# Altium PCB STM32四轴.PcbDoc (part 2 of 2)
Units mil, origin at the board's own origin, x right, y up, seen from the top; angles counter-clockwise.
Board outline 3937.01 x 3937.01 mil, 2 copper layers (Top Layer, Bottom Layer); 118 components, 144 nets, 597 pads, 182 vias.
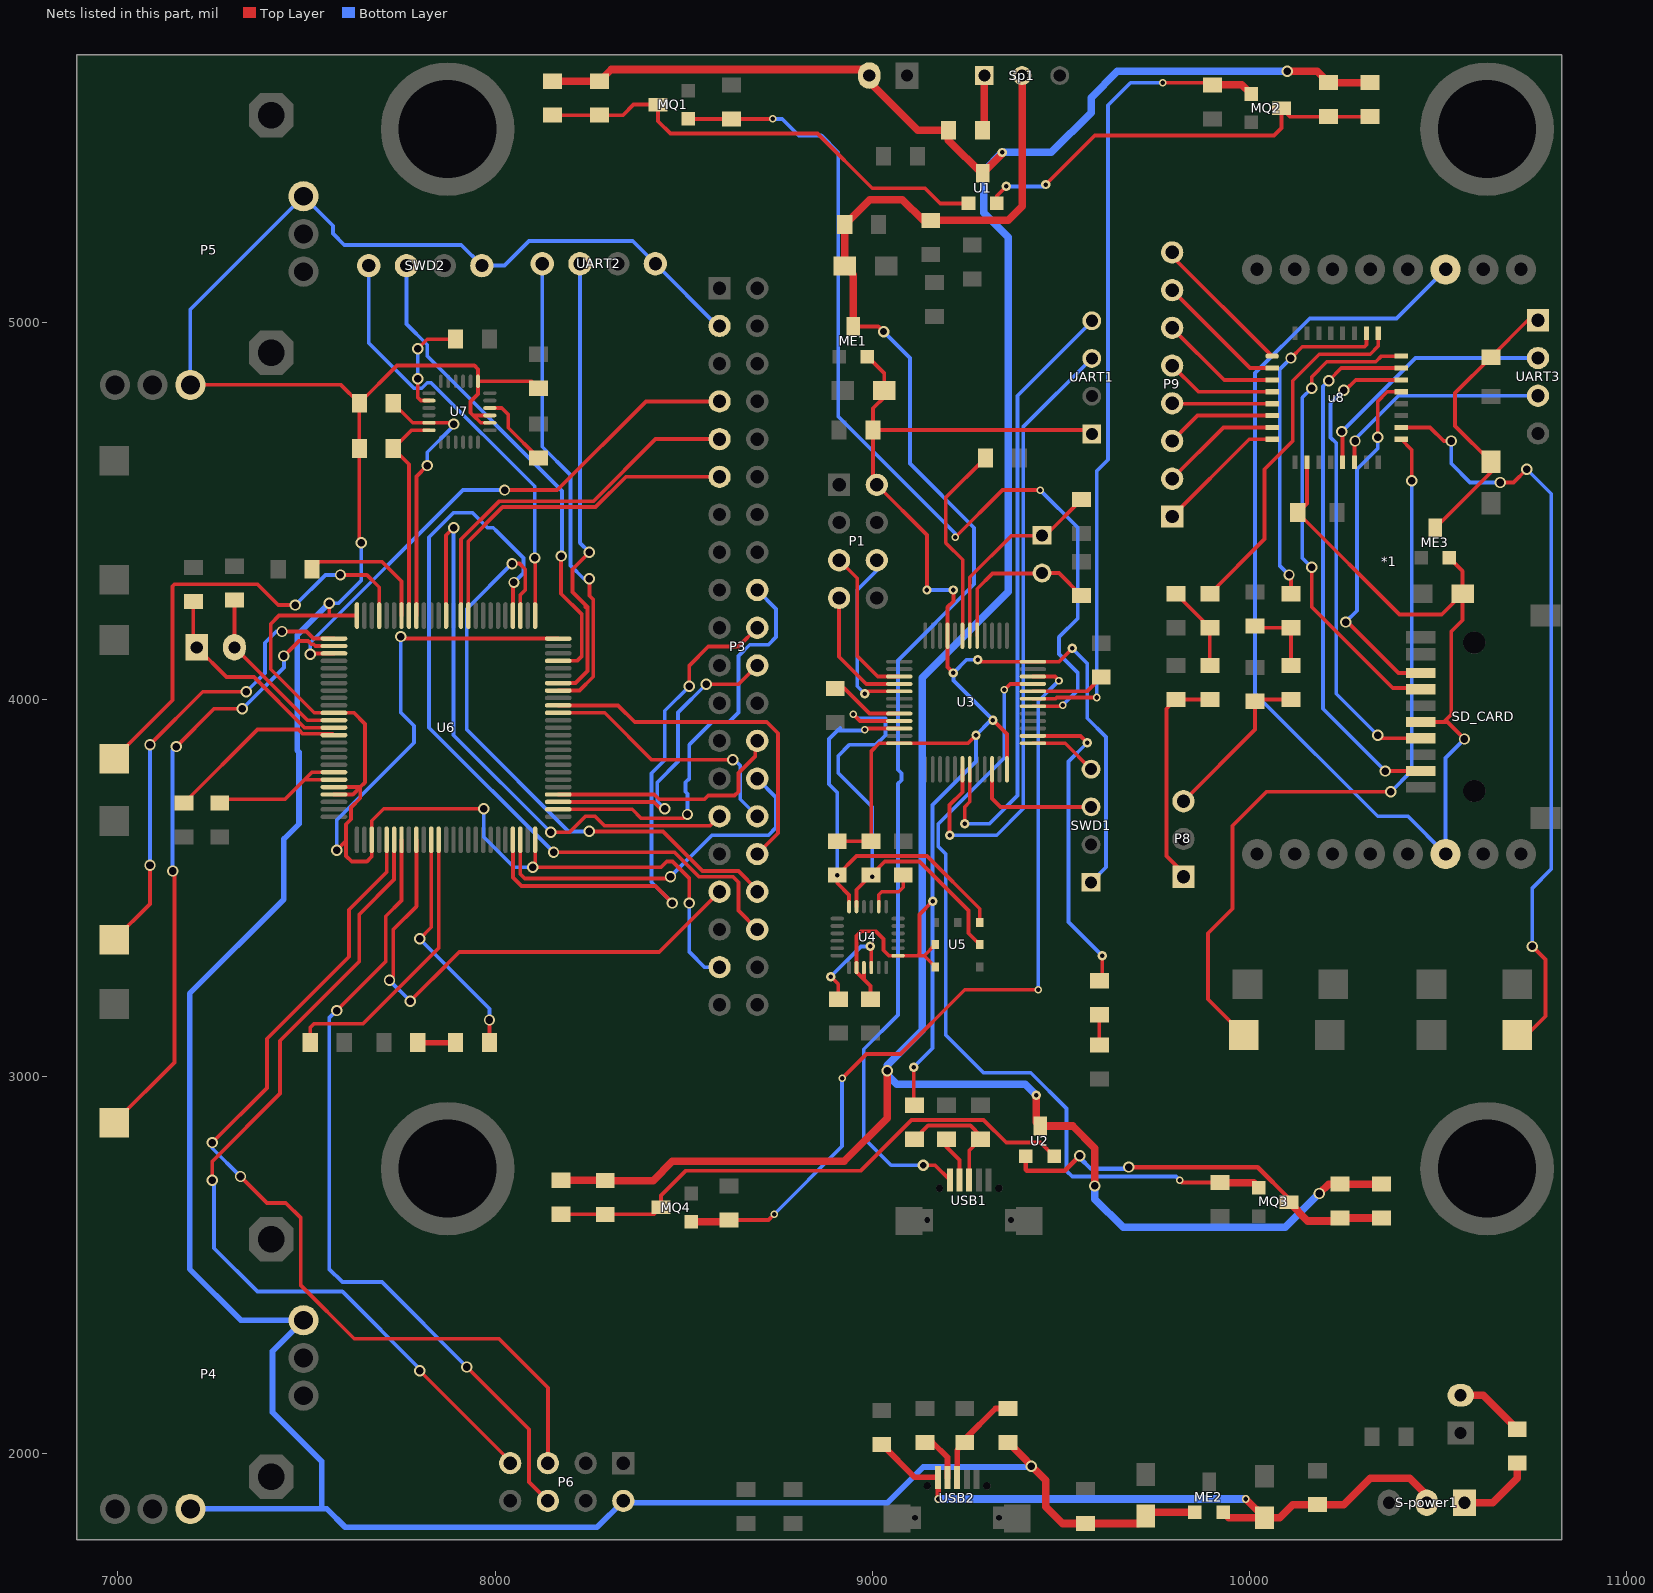
[diagram p2: the nets of this part, all layers, seen from the top]

## Via types
v1: diameter 30, hole 20, Top Layer to Bottom Layer, 121 vias
v2: diameter 25, hole 12, Top Layer to Bottom Layer, 40 vias
v3: diameter 20, hole 12, Top Layer to Bottom Layer, 18 vias
v4: diameter 30, hole 18, Top Layer to Bottom Layer, 3 vias

## Nets (pads, with @x,y where several pads share a name; then routed paths per layer and width w, separated by ;. In a path a pad name is that pad's centre, name@x,y a point inside that pad or via, vN(x,y) a via of type N, cw(c..) or ccw(c..) an arc to the next point about the centre after c; other vN are vias at no path point) (continued)
KEY2Y: S2.1 U6.97 | length 1216
  Top Layer w10: S2.1@6990,3842.52 7145,3997.52 7145,4300 7150,4305 7370,4305 7425,4250 v1(7470,4250) ; v1(7590,4330) 7660,4330 7692.83,4297.17 U6.97@7692.83,4222.24
  Bottom Layer w10: v1(7470,4250) 7550,4330 v1(7590,4330)
KEY3-51: S7.1 u8.18 | length 2050.5
  Top Layer w10: u8.18@10402.52,4721.02 10478.98,4721.02 10515,4685 v1(10535,4685) ; v1(10665,4575) 10700,4575 v1(10735,4610) ; S7.1@10710,3110 10735,3110 10785,3160 10785,3310 v1(10750,3345)
  Bottom Layer w10: v1(10535,4685) 10535,4625 10585,4575 v1(10665,4575) ; v1(10735,4610) 10800,4545 10800,3550 10750,3500 v1(10750,3345)
KEY3Y: S3.1 U6.1 | length 1223.5
  Top Layer w10: S3.1@6990,3362.52 7085,3457.52 v1(7085,3560) ; v1(7085,3880) 7225,4020 v1(7340,4020) ; v1(7435,4180) 7500,4180 7518.78,4161.22 U6.1@7572.76,4161.22
  Bottom Layer w10: v1(7085,3560) v1(7085,3880) ; v1(7340,4020) 7390,4070 7390,4150 7420,4180 v1(7435,4180)
KEY4-51: S8.1 u8.17 | length 2047.2
  Top Layer w10: S8.1@9985,3110 9890,3205 9890,3380 9955,3445 9955,3665 10045,3755 v1(10375,3755) ; u8.17@10402.52,4689.53 10430,4662.05 v1(10430,4580)
  Bottom Layer w10: v1(10375,3755) 10430,3810 v1(10430,4580)
KEY4Y: S4.1 U6.2 | length 1627.1
  Top Layer w10: S4.1@6990,2877.52 7150,3037.52 7150,3540 v1(7145,3545) ; v1(7155,3875) 7255,3975 v1(7330,3975) ; v1(7440,4115) 7480,4155 7503.79,4155 7512.57,4146.22 7519.13,4146.22 7523.82,4141.54 U6.2@7572.76,4141.54
  Bottom Layer w10: v1(7145,3545) 7145,3865 v1(7155,3875) ; v1(7330,3975) 7330.36,3975 7440,4084.64 v1(7440,4115)
LCD_CS: P3.29 U6.88 | length 1646
  Top Layer w10: U6.88@7870,4222.24 7870,4435 v1(7890,4455) ; v1(8147.5,3647.5) 8197.5,3647.5 8240,3690 8265,3690 8290,3665 8570,3665 P3.29@8595,3690
  Bottom Layer w10: v1@7890,4460 v1(7890,4455) 7890,3905 v1(8147.5,3647.5)
LCD_RD: P3.11 U6.85 | length 933.6
  Top Layer w10: U6.85@7929.06,4222.24 7929.06,4419.06 8020,4510 8266.21,4510 8346.21,4590 P3.11@8595,4590
LCD_REST: P3.33 U6.34 | length 1420.4
  Top Layer w10: v1(7720,3255) 7730,3265 7730,3390 7791.26,3451.26 U6.34@7791.26,3627.76 ; v1(7775,3200) 7775,3200.36 7834.64,3260 7835,3260 7905,3330 8435,3330 P3.33@8595,3490
  Bottom Layer w10: v1(7720,3255) v1(7775,3200)
LCD_RS: P3.7 U6.3 | length 1443.6
  Top Layer w10: v1(7510,4120) 7511.85,4121.85 U6.3@7572.76,4121.85 ; v1(8025,4555) 8165,4555 8400,4790 P3.7@8595,4790
  Bottom Layer w10: v1(7510,4120) 7510,4150 7915,4555 v1(8025,4555)
LCD_WR: P3.9 U6.86 | length 997.8
  Top Layer w10: U6.86@7909.37,4222.24 7909.37,4424.37 8010,4525 8260,4525 8425,4690 P3.9@8595,4690
LED: D1.1 U3.38 | length 844
  Top Layer w10: U3.38@9425.9,3903.16 9551.84,3903.16 v2(9570,3885) ; D1.1@9602,3253.91 9610,3261.91 v2(9610,3320)
  Bottom Layer w10: v2(9570,3885) 9520,3835 9520,3410 v2(9610,3320)
LEDY: D2.1 U6.36 | length 627.1
  Top Layer w10: v1(7800,3365) 7830.63,3395.63 U6.36@7830.63,3627.76 ; D2.1@7985,3090 v1(7985,3150)
  Bottom Layer w10: v1(7800,3365) 7985,3180 v1(7985,3150)
MISO: P1.7 U3.16 | length 345.3
  Top Layer w10: P1.7@8912,4268.91 8912,4113 8984.05,4040.95 U3.16@9071.57,4040.95
MISOY: P6.7 U6.31 | length 2311.5
  Top Layer w10: v1(7250,2725) 7250,2775 7430,2955 7430,3095 7640,3305 7640,3430 7732.2,3522.2 U6.31@7732.2,3627.76 ; v1(7800,2220) 8040,1980 P6.7@8040,1975
  Bottom Layer w10: v1(7250,2725) 7255,2720 7255,2545 7370,2430 7595,2430 7800,2225 v1(7800,2220)
MOSI: P1.6 U3.17 | length 477.9
  Top Layer w10: v2(8980,4015) 8986.27,4021.27 U3.17@9071.57,4021.27
  Bottom Layer w10: v2(8980,4015) 8960,4035 8960,4290 9012,4342 P1.6@9012,4368.91
MOSIY: P6.6 U6.32 | length 2134
  Top Layer w10: v1(7580,3175) 7710,3305 7710,3425 7751.89,3466.89 U6.32@7751.89,3627.76 ; v1(7925,2230) 8090,2065 8090,1925 P6.6@8140,1875
  Bottom Layer w10: v1(7580,3175) 7560,3155 7560,2490 7595,2455 7700,2455 v1(7925,2230)
NetC1_2: C1.2 M1.1 MQ1.3 U1.2 | length 1248.8
  Top Layer w10: M1.1@8152,5548.91 C1.2@8277,5548.91 8338.91,5548.91 8366.91,5576.91 MQ1.3@8432,5576.91 8432,5533 8465,5500 8855,5500 9000,5355 9140,5355 9180,5315 U1.2@9255,5315
NetC2_2: C2.2 M2.2 MQ2.3 U1.3 | length 1145.7
  Top Layer w10: U1.3@9330,5315 9330,5335 v2(9355,5360) ; v2(9460,5365) 9590,5495 10065,5495 10085,5515 MQ2.3@10085,5567 10107,5545 C2.2@10210,5545 M2.2@10320,5545
  Bottom Layer w10: v2(9355,5360) 9455,5360 v2(9460,5365)
NetC3_2: C3.2 M3.1 MQ3.3 U2.2 | length 1084.4
  Top Layer w12: U2.2@9407,2788.91 9407,2753 9410,2750 9510,2750 v1(9550,2790) ; v1(9680,2760) 10021.56,2760 10105,2676.56 MQ3.3@10105,2667
  Top Layer w20: MQ3.3@10105,2667 10155,2617 10232,2617 C3.2@10240,2625 M3.1@10350,2625
  Bottom Layer w12: v1(9550,2790) 9550,2785 9580,2755 9675,2755 v1(9680,2760)
NetC4_2: C4.2 M4.2 MQ4.3 U2.3 | length 1477.2
  Top Layer w10: M4.2@8175,2635 8422,2635 MQ4.3@8440,2653 8440,2685 8505,2750 8968.95,2750 9103.95,2885 9295.05,2885 9355.05,2825 9445.91,2825 U2.3@9482,2788.91 U2.3@9473.91,2788.91
NetC5_2: C5.2 U3.5 Y1.2 | length 441.7
  Top Layer w10: U3.5@9278.26,4168.91 9278.26,4293.26 9318.91,4333.91 Y1.2@9448.91,4333.91 ; Y1.2@9450,4335 9495,4335 C5.2@9555,4275
NetC6_2: C6.2 U3.6 Y1.1 | length 535.1
  Top Layer w10: U3.6@9258.58,4168.91 9258.58,4323.57 9368.91,4433.91 Y1.1@9448.91,4433.91 ; Y1.1@9450,4435 9460,4435 C6.2@9555,4530
NetC7_2: C7.2 U3.7 | length 533.7
  Top Layer w10: U3.7@9238.89,4168.91 9240,4170.02 9240,4370 9195,4415 9195,4535 C7.2@9300,4640
NetC8_1: C8.1 U4.20 | length 136.7
  Top Layer w10: U4.20@9017.24,3450.4 9017.24,3482.24 9025,3490 9070,3490 9082,3502 C8.1@9082,3533.91
NetC10_2: C10.2 U4.10 | length 263.5
  Top Layer w10: v2(8890,3265) 8910,3245 C10.2@8910,3205 ; v2(8995,3345) 8997.55,3342.45 U4.10@8997.55,3288.98
  Bottom Layer w10: v2(8890,3265) 8970,3345 v2(8995,3345)
NetC12_1: C12.1 U7.20 | length 273.2
  Top Layer w10: v1(7795,4850) 7795,4800 7802.76,4792.24 U7.20@7824.6,4792.24 ; v1(7795,4930) 7820,4955 C12.1@7895,4955
  Bottom Layer w10: v1(7795,4850) v1(7795,4930)
NetC14_2: C14.2 U7.10 | length 204.4
  Top Layer w10: U7.10@7986.02,4772.55 8017.45,4772.55 8035,4755 8035,4720 C14.2@8115,4640
NetC15_2: C15.2 U6.12 Y2.2 | length 468.9
  Top Layer w10: C15.2@7308.91,4263 Y2.2@7308.91,4138 7502.22,3944.68 U6.12@7572.76,3944.68
NetC16_2: C16.2 U6.13 Y2.1 | length 565.2
  Top Layer w10: Y2.1@7200,4146.91 C16.2@7200,4260 ; Y2.1@7208.91,4138 7287.81,4059.1 7360.9,4059.1 7495,3925 U6.13@7572.76,3925
NetC18_2: C18.2 U6.94 | length 357.5
  Top Layer w10: C18.2@7515,4345 7535,4365 7700,4365 7751.89,4313.11 U6.94@7751.89,4222.24
NetC19_2: C19.2 R25.1 R26.2 | length 227.3
  Top Layer w10: C19.2@9805,4280 R25.1@9895,4190 R26.2@9895,4090
NetC20_2: C20.2 P8.1 R26.1 | length 589
  Top Layer w10: P8.1@9825,3530 9825,3540 9780,3585 9780,3975 C20.2@9805,4000 R26.1@9895,4000
NetC21_2: C21.2 R27.1 R28.2 | length 190
  Top Layer w10: C21.2@10020,4190 R27.1@10110,4190 R28.2@10110,4090
NetC22_2: C22.2 P8.3 R28.1 | length 433.7
  Top Layer w10: P8.3@9825,3730 10015,3920 C22.2@10015,3995 ; C22.2@10020,4000 R28.1@10110,4000
NetD1_2: D1.2 R12.2 | length 80
  Top Layer w10: R12.2@9602,3083.91 D1.2@9602,3163.91
NetD2_2: D2.2 R21.2 | length 100
  Top Layer w15: R21.2@7795,3090 D2.2@7895,3090
NetL1_2: L1.2 Sp1.1 | length 140
  Top Layer w20: L1.2@9297,5513.91 Sp1.1@9297,5653.91
NetL3_2: L3.2 U6.19 U6.20 | length 414.4
  Top Layer w10: L3.2@7270,3725 7280,3735 7442.8,3735 7514.69,3806.89 U6.19@7572.76,3806.89 ; 7495,3787.2 U6.20@7572.76,3787.2
NetL4_2: L4.2 S-power1.1 | length 206.9
  Top Layer w20: S-power1.1@10570,1870 10645,1870 10710,1935 L4.2@10710,1975
NetP9_1: P9.1 u8.8 | length 349.7
  Top Layer w10: P9.1@9795,4485 9999.53,4689.53 u8.8@10060,4689.53
NetP9_2: P9.2 u8.7 | length 321.3
  Top Layer w10: P9.2@9795,4585 9931.02,4721.02 u8.7@10060,4721.02
NetP9_3: P9.3 u8.6 | length 293
  Top Layer w10: P9.3@9795,4685 9862.52,4752.52 u8.6@10060,4752.52
NetP9_4: P9.4 u8.5 | length 264
  Top Layer w10: P9.4@9795.98,4784.02 u8.5@10060,4784.02
NetP9_5: P9.5 u8.4 | length 293.8
  Top Layer w10: P9.5@9795,4885 9864.49,4815.51 u8.4@10060,4815.51
NetP9_6: P9.6 u8.3 | length 322.2
  Top Layer w10: P9.6@9795,4985 9932.99,4847.01 u8.3@10060,4847.01
NetP9_7: P9.7 u8.2 | length 350.5
  Top Layer w10: P9.7@9795,5085 10001.5,4878.5 u8.2@10060,4878.5
NetP9_8: P9.8 u8.1 | length 384.8
  Top Layer w10: P9.8@9795,5185 9795,5175 u8.1@10060,4910
NetR1_1: R1.1 U3.20 | length 197.2
  Top Layer w10: R1.1@8902,4028.91 8926.09,4028.91 8992.79,3962.21 U3.20@9071.57,3962.21
NetR6_1: R6.1 U3.44 | length 196.7
  Top Layer w10: U3.44@9425.9,4021.27 9569.36,4021.27 R6.1@9607,4058.91
NetR10_1: R10.1 USB1.2 | length 122.6
  Top Layer w10: R10.1@9197,2833.91 9197,2813 9231.41,2778.59 USB1.2@9231.41,2725.52
NetR13_1: R13.1 R14.1 USB1.3 | length 331
  Top Layer w10: R14.1@9112,2833.91 9148.09,2870 9260,2870 9287,2843 R13.1@9287,2833.91 9257,2803.91 USB1.3@9257,2725.52
NetR17_1: R17.1 U6.37 | length 754.9
  Top Layer w10: R17.1@7510,3090 7510,3130 7520,3140 7650,3140 7850.31,3340.32 U6.37@7850.31,3627.76
NetR18_1: R18.1 U6.14 | length 477.5
  Top Layer w10: R18.1@7180,3730 7370,3920 7478.79,3920 7489.69,3909.09 7568.98,3909.09 U6.14@7572.76,3905.32
NetR22_1: R22.1 USB2.2 | length 129.7
  Top Layer w15: R22.1@9140,2030 9160,2030 9199.41,1990.59 USB2.2@9199.41,1936.61
NetR23_1: R23.1 R24.1 USB2.3 | length 250.5
  Top Layer w15: USB2.3@9225,1936.61 9225,2010 R23.1@9245,2030 ; R23.1@9245,2038.28 9326.72,2120 R24.1@9360,2120
PWM1: MQ1.1 R2.1 U3.42 | length 2613.9
  Top Layer w10: MQ1.1@8512,5538.91 R2.1@8627,5538.91 v3(8736.09,5538.91) ; v3(9220,4430) 9345,4555 v3(9445,4555) ; U3.42@9425.9,3981.9 9501.9,3981.9 v3(9505,3985)
  Bottom Layer w10: v3(8736.09,5538.91) 8761.09,5538.91 8805,5495 8865,5495 8910,5450 8910,4750 9225,4435 v3(9220,4430) ; v3(9445,4555) 9545,4455 9545,4215 9495,4165 9495,4120 9545,4070 9545,4025 v3(9505,3985)
PWM2: MQ2.1 R3.1 U3.43 | length 2171.1
  Top Layer w10: U3.43@9425.9,4001.58 9486.58,4001.58 9490,4005 v3(9595,4005) ; v3(9770,5635) 9895.91,5635 R3.1@9902,5628.91
  Top Layer w20: R3.1@9902,5628.91 9903.09,5630 9980,5630 MQ2.1@10005,5605
  Bottom Layer w10: v3(9595,4005) 9595,4605.56 9625,4635.56 9625,5575 9685,5635 v3(9770,5635)
PWM3: MQ3.1 R4.1 U3.45 | length 2172.7
  Top Layer w10: v3(9350,4025) 9365.95,4040.95 U3.45@9425.9,4040.95 ; v3(9815,2725) 9821.09,2718.91 R4.1@9922,2718.91
  Top Layer w20: R4.1@9922,2718.91 10011.09,2718.91 MQ3.1@10025,2705
  Bottom Layer w10: v3(9350,4025) 9350,3845 9175,3670 9175,3610 9195,3590 9195,3110 9295,3010 9420,3010 9515,2915 9515,2750 9530,2735 9805,2735 v3(9815,2725)
PWM4: MQ4.1 R5.1 U3.46 | length 2199.4
  Top Layer w10: R5.1@8620,2620 8725,2620 v3(8740,2635) ; v3(8920,2995) 8985,3060 9075,3060 9245,3230 v3(9440,3230) ; U3.46@9425.9,4060.64 9484.36,4060.64 v3(9495,4050)
  Top Layer w20: MQ4.1@8520,2615 R5.1@8615,2615
  Bottom Layer w10: v3(8740,2635) 8920,2815 v3(8920,2995) ; v3(9440,3230) 9440,3975 ; 9440,3985 9440,3975 ; v3(9495,4050) 9440,3995 9440,3975
PWM-DAC1: R25.2 u8.25 | length 955
  Top Layer w10: R25.2@9895,4280 10040,4425 10040,4610 10115,4685 10115,4845 10185,4915 10320,4915 10341.5,4936.5 u8.25@10341.5,4971.02
PWM-DAC2: R27.2 u8.26 | length 905.4
  Top Layer w10: v1(10105,4330) 10110,4325 R27.2@10110,4280 ; v1(10110,4905) 10140,4935 10305,4935 10310,4940 u8.26@10310,4971.02
  Bottom Layer w10: v1(10105,4330) 10080,4355 10080,4875 v1(10110,4905) v1@10110,4915
RX1: U3.30 UART1.3 | length 1681.9
  Top Layer w10: v2(9205,3640) 9205,3720 9238.89,3753.89 U3.30@9238.89,3814.58
  Bottom Layer w10: v2(9205,3640) 9330,3640 9400,3710 9400,4721.91 UART1.3@9582,4903.91
RX1Y: U6.69 UART2.3 | length 1221.5
  Top Layer w10: U6.69@8167.24,4043.11 8213.11,4043.11 8245,4075 8245,4245 ; 8240,4245 8245,4245 ; v1(8250,4390) 8205,4345 8205,4285 8245,4245
  Bottom Layer w10: UART2.3@8225,5155 8225,4415 v1(8250,4390)
RXD-51: u8.13 UART3.2 | length 680.3
  Top Layer w10: u8.13@10247.01,4628.5 v1@10247.01,4707.99
  Bottom Layer w10: v1(10245,4710) 10440,4905 UART3.2@10765,4905
SCK: P1.5 U3.15 | length 407.9
  Top Layer w10: P1.5@8912,4368.91 8960,4320.91 8960,4115 9014.36,4060.64 U3.15@9071.57,4060.64
SCKY: P6.5 U6.30 | length 2467
  Top Layer w10: v1(7250,2825) 7395,2970 7395,3100 7612.5,3317.5 7612.5,3442.5 7712.52,3542.52 U6.30@7712.52,3627.76 ; v1(7325,2735) 7395,2665 7445,2665 7485,2625 7485,2446.36 7626.36,2305 8010,2305 8140,2175 P6.5@8140,1975
  Bottom Layer w10: v1(7250,2825) 7250,2810 v1(7325,2735)
SCL: R8.1 U3.21 U4.23 U5.5 | length 1297
  Top Layer w10: v3(8950,3960) 8967.47,3942.53 U3.21@9071.57,3942.53 ; U4.23@8958.18,3450.4 8958.18,3495.09 R8.1@8997,3533.91 9033.09,3570 9125,3570 9255,3440 9255,3379.96 U5.5@9285.11,3349.85
  Bottom Layer w10: v3(8950,3960) 8960,3950 9035,3950 9035,3905 9010,3880 8940,3880 8910,3850 8910,3805 9000,3715 v3(9000,3530)
SCLY: R16.1 U6.92 U7.23 | length 731.4
  Top Layer w10: R16.1@7730,4785 7781.82,4733.18 U7.23@7824.6,4733.18 7886.82,4733.18 v1(7890,4730) ; U6.92@7791.26,4222.24 7791.26,4591.26 v1(7820,4620)
  Bottom Layer w10: v1(7820,4620) 7820,4655 7890,4725 v1(7890,4730)
SD-CS: SD_CARD.1 u8.21 | length 948.6
  Top Layer w10: v1(10255,4205) 10260,4205 10394.96,4070.04 SD_CARD.1@10454.38,4070.04 ; v1(10340,4695) 10340,4790 10365.51,4815.51 u8.21@10402.52,4815.51
  Bottom Layer w10: v1(10255,4205) 10285,4235 10285,4610 10340,4665 v1(10340,4695)
SD-MISO: SD_CARD.7 u8.23 | length 1410.4
  Top Layer w10: v1(10210,4845) 10243.5,4878.5 u8.23@10402.52,4878.5 ; v1(10360,3810) 10360.19,3810.19 SD_CARD.7@10454.38,3810.19
  Bottom Layer w10: v1(10210,4845) 10195,4830 10195,3975 v1(10360,3810)
SD-MOSI: SD_CARD.2 u8.24 | length 1270.8
  Top Layer w10: v1(10165,4350) 10165,4245 10380,4030 10451.11,4030 SD_CARD.2@10454.38,4026.73 ; v1(10165,4825) 10165,4855 10205,4895 10335,4895 10350,4910 u8.24@10402.52,4910
  Bottom Layer w10: v1(10165,4350) 10140,4375 10140,4800 v1(10165,4825)
SD-SCK: SD_CARD.5 u8.22 | length 1257.8
  Top Layer w10: v1@10255,4820 10282.01,4847.01 u8.22@10402.52,4847.01 ; v1(10340,3905) 10348.19,3896.81 SD_CARD.5@10454.38,3896.81
  Bottom Layer w10: v1(10250,4820) 10215,4785 10215,4694.64 10230,4679.64 10230,4015 v1(10340,3905)
SD_CS: P3.36 U6.79 | length 2142.8
  Top Layer w10: U6.79@8047.17,4222.24 v1@8047.17,4307.17 ; v1(8155,3595) 8475,3595 8540,3530 8630,3530 8645,3515 8645,3440 P3.36@8695,3390
  Bottom Layer w10: 8015.86,4434.14 8005,4445 ; v1(8050,4310) 8075,4335 8075,4375 8005,4445 ; v1(8155,3595) 7825,3925 7825,4430 7890,4495 7940,4495 7980,4455 7995,4455 8005,4445
SD_DIN: P3.34 U6.78 | length 1610.2
  Top Layer w10: v1(8045,4360) 8065,4360 8080,4345 8080,4290 8066.85,4276.85 U6.78@8066.85,4222.24 ; v1(8250,3650) 8445,3650 8550,3545 8645,3545 8695,3495 P3.34@8695,3490
  Bottom Layer w10: v1(8045,4360) 7925,4240 7925,3920 8195,3650 v1(8250,3650)
SD_OUT: P3.30 U6.65 | length 689.1
  Top Layer w10: U6.65@8167.24,3964.37 8290.63,3964.37 8415,3840 v1(8630,3840)
  Bottom Layer w10: v1@8635,3840 8650,3825 8650,3735 P3.30@8695,3690
SD_SCK: P3.32 U6.66 | length 956.2
  Top Layer w10: U6.66@8167.24,3984.06 8325.94,3984.06 8370,3940 8720,3940 8750.03,3909.97 8750.03,3645.03 P3.32@8695,3590
SDA: R7.1 U3.22 U4.24 U5.6 | length 1168.8
  Top Layer w10: U4.24@8938.5,3450.4 8938.5,3481.5 8907,3513 v3(8907,3533.91) 8958.09,3585 9145,3585 9285.11,3444.89 U5.6@9285.11,3408.91 ; v3(8980,3920) 8982.84,3922.84 U3.22@9071.57,3922.84
  Bottom Layer w10: v3(8907,3533.91) 8907,3753 8885,3775 8885,3895 8907.5,3917.5 ; 8915,3925 8907.5,3917.5 ; v3(8980,3920) 8977.5,3917.5 8907.5,3917.5
SDAY: R15.1 U6.93 U7.24 | length 574.7
  Top Layer w10: U6.93@7771.57,4222.24 7771.57,4623.43 R15.1@7730,4665 7778.5,4713.5 U7.24@7824.6,4713.5
SWCLK: SWD1.4 U3.37 | length 182.5
  Top Layer w10: U3.37@9425.9,3883.47 9511.53,3883.47 SWD1.4@9580,3815
SWCLKY: SWD2.4 U6.76 | length 1156.3
  Top Layer w10: U6.76@8106.22,4222.24 v1@8106.22,4373.78
  Bottom Layer w10: SWD2.4@7665,5150 7665,4944.64 7784.64,4825 7805.36,4825 7820,4839.64 7830.36,4839.64 8105,4565 v1(8105,4375)
SWDIO: SWD1.3 U3.34 | length 348.8
  Top Layer w10: U3.34@9317.63,3814.58 9317.63,3737.37 9340,3715 SWD1.3@9580,3715
SWDIOY: SWD2.3 U6.72 | length 1296.7
  Top Layer w10: U6.72@8167.24,4102.17 8217.17,4102.17 8230,4115 8230,4225 8175,4280 v1(8175,4380)
  Bottom Layer w10: SWD2.3@7765,5150 7765,4995.36 7820,4940.36 7820,4910 8177.5,4552.5 v1@8177.5,4380
T_CLK: P3.18 U6.52 | length 1129.5
  Top Layer w10: U6.52@8167.24,3708.46 8363.46,3708.46 8386.93,3685 8500,3685 v1(8510,3695)
  Bottom Layer w10: v1(8510,3695) 8510,3750 8505,3755 8505,3780.36 8515,3790.36 8515,3880 8575,3940 8620,3940 8645,3965 8645,4115 8675,4145 8725,4145 8745,4165 8745,4240 P3.18@8695,4290
T_CS: P3.20 U6.47 | length 1466.5
  Top Layer w10: U6.47@8047.17,3627.76 8047.17,3527.83 8070,3505 8425,3505 v1(8470,3460) ; v1(8515,4035) 8515,4090 8565,4140 8645,4140 P3.20@8695,4190
  Bottom Layer w10: v1(8470,3460) 8415,3515 8415,3804.08 8450,3839.08 8450,3970 v1(8515,4035)
T_DIN: P3.22 U6.53 | length 838.1
  Top Layer w10: U6.53@8167.24,3728.15 8420.64,3728.15 8438.79,3710 v1(8450,3710) ; v1(8560,4040) 8645,4040 P3.22@8695,4090
  Bottom Layer w10: v1(8450,3710) 8430,3730 8430,3780 8485,3835 8485,3965 v1(8560,4040)
T_IRQ: P3.28 U6.48 | length 980.6
  Top Layer w10: U6.48@8066.85,3627.76 8066.85,3536.85 8078.7,3525 8460,3525 v1(8465,3530)
  Bottom Layer w10: v1(8465,3530) 8575,3640 8725,3640 8745,3660 8745,3740 P3.28@8695,3790
T_OUT: P3.26 U6.54 | length 647.1
  Top Layer w10: U6.54@8167.24,3747.83 8422.17,3747.83 8435,3735 8555,3735 8565,3745 8635,3745 8645,3755 8645,3805 8690,3850 8690,3885 P3.26@8695,3890
TX1: U3.31 UART1.4 | length 1661.8
  Top Layer w10: v2(9245,3670) 9245,3715 9258.58,3728.57 U3.31@9258.58,3814.58
  Bottom Layer w10: v2(9245,3670) 9310,3670 9385,3745 9385,4805 9582,5002 UART1.4@9582,5003.91
TX1Y: U6.68 UART2.4 | length 1267.6
  Top Layer w10: U6.68@8167.24,4023.43 8223.43,4023.43 8260,4060 8260,4265 8250,4275 v1(8250,4320)
  Bottom Layer w10: UART2.4@8125,5155 8125,4670 8200,4595 8200,4355 8235,4320 v1(8250,4320)
TXD-51: u8.14 UART3.3 | length 607.7
  Top Layer w10: u8.14@10278.5,4628.5 10278.5,4681.5 10275,4685 v1(10280,4685)
  Bottom Layer w10: v1(10280,4685) 10275,4685 10395,4805 UART3.3@10765,4805
VCC: Cp2.1 Cp3.2 ME1.3 R9.2 Sp1.2 USB1.1 | length 3888
  Top Layer w10: ME1.3@8950,4988.91 9016.09,4988.91 v4(9030,4975) ; v4(9135,2765) 9166.34,2765 USB1.1@9205.82,2725.52
  Top Layer w20: ME1.3@8950,4988.91 8950,5125.91 Cp2.1@8927,5148.91 Cp3.2@8927,5258.91 8993.09,5325 9080,5325 9135,5270 R9.2@9155,5270 9360,5270 9397,5307 Sp1.2@9397,5653.91
  Bottom Layer w10: v4(9030,4975) 9100,4905 9100,4625 9270,4455 9270,4305 9068.42,4103.42 9068.42,3813.4 9077.5,3804.32 9077.5,3785.68 9068.42,3776.6 9068.42,3163.17 8977.5,3072.25 8977.5,2837.5 9050,2765 v4(9135,2765)
VCC3.3: C9.2 Cp1.1 Cp4.2 ME1.2 P1.2 R7.2 R8.2 R14.2 SWD1.1 U3.9 U3.24 U3.36 U3.48 U4.8 U4.9 U4.13 U5.2 U5.3 UART1.1 | length 5354.5
  Top Layer w10: R7.2@8907,3623.91 R8.2@8997,3623.91 8997,3862 9018.47,3883.47 U3.24@9071.57,3883.47 9253.47,3883.47 v2(9275,3905) ; U4.9@8977.87,3288.98 8977.87,3257.13 ; ME1.2@8987,4908.91 9032,4863.91 Cp1.1@9032,4818.91 9032,4802 9002,4772 Cp4.2@9002,4713.91 ; C9.2@8995,3205 8995,3240 8977.87,3257.13 ; v2(9110,3025) 9110,2925.91 R14.2@9112,2923.91 ; v2(9145,4290) 9145,4435.91 P1.2@9012,4568.91 9002,4578.91 Cp4.2@9002,4713.91 ; v2(9160,3465) 9125,3430 9125,3325.48 9120,3320.48 ; U5.3@9167,3290.8 9167,3291.11 9137.63,3320.48 ; U5.2@9167,3349.85 9137.63,3320.48 ; v2(9215,4070) 9199.52,4085.48 U3.9@9199.52,4168.91 9199.52,4244.52 9215,4260 v2(9215,4290) ; v2(9280,4105) 9284.99,4100.01 U3.48@9425.9,4100.01 9495.01,4100.01 v2(9530,4135) ; v2(9320,3945) 9357,3908 U3.36@9357,3814.58 ; UART1.1@9582,4703.91 9572,4713.91 Cp4.2@9002,4713.91 ; 8977.87,3257.13 8958.18,3276.82 U4.8@8958.18,3288.98 8958.18,3373.18 8970,3385 9010,3385 9030,3365 9030,3335 9044.52,3320.48 U4.13@9068.42,3320.48 9120,3320.48 ; 9120,3320.48 9137.63,3320.48
  Bottom Layer w10: v2(9110,3025) 9160,3075 v2(9160,3465) 9160,3720 9275,3835 v2(9275,3905) 9315,3945 v2(9320,3945) 9215,4050 v2(9215,4070) 9250,4105 v2(9280,4105) ; v2(9145,4290) v2(9215,4290) ; v2(9530,4135) 9570,4095 9570,3950 9620,3900 9620,3555 SWD1.1@9580,3515
VCC3.3Y: C13.2 Cp6.1 Cp8.2 ME2.2 P3.3 P3.37 P4.1 P5.1 P6.2 R15.2 R16.2 R24.2 SWD2.1 U6.11 U6.21 U6.22 U6.28 U6.50 U6.75 U6.100 U7.8 U7.9 U7.13 UART2.1 | length 13472.9
  Top Layer w10: P5.1@7192,4833.91 7591.09,4833.91 R16.2@7640,4785 ; v1(7560,4255) 7560,4222.24 ; U6.22@7572.76,3747.83 7622.83,3747.83 7642.52,3767.52 ; U6.21@7572.76,3767.52 7642.52,3767.52 ; v1(7580,3600) 7605,3625 ; U6.11@7605.09,3964.37 U6.11@7572.76,3964.37 ; U6.100@7633.78,4222.24 7560,4222.24 ; v1(7645,4415) 7640,4420 R15.2@7640,4665 R16.2@7640,4785 ; v1(7750,4166.54) 7750,4165 7753.78,4161.22 U6.75@8167.24,4161.22 U6.75@8166.02,4160 ; v1(7970,3710) 7705,3710 7673.15,3678.15 U6.28@7673.15,3627.76 7673.15,3583.15 7660,3570 7620,3570 7605,3585 7605,3625 ; U7.8@7986.02,4733.18 7961.82,4733.18 7942.13,4752.87 ; U7.9@7986.02,4752.87 7942.13,4752.87 ; U6.50@8106.22,3627.76 8106.22,3561.22 v1(8100,3555) 8440,3555 8455,3570 8470,3570 8515,3525 v1(8515,3460) ; C13.2@8115,4825 8096.58,4843.42 U7.13@7954.52,4843.42 ; 7560,4222.24 7427.24,4222.24 7405,4200 7405,4080 7520.63,3964.37 U6.11@7572.76,3964.37 ; U6.11@7572.76,3964.37 7625.63,3964.37 7655,3935 7655,3780 7642.52,3767.52 ; 7605,3625 7605,3669 7618.19,3682.19 7618.19,3713.73 7642.52,3738.06 7642.52,3767.52 ; R16.2@7640,4785 7740,4885 7945,4885 7954.52,4875.48 U7.13@7954.52,4843.42 ; 7942.13,4752.87 7935,4760 7935,4790 7954.52,4809.52 U7.13@7954.52,4843.42
  Top Layer w20: R24.2@9360,2030 9460,1930 9460,1860 9505,1815 Cp8.2@9565,1815 9705,1815 9735,1845 ME2.2@9855,1845
  Bottom Layer w10: P5.1@7192,4833.91 7192,5033.91 P5.1@7492,5333.91 7570,5255.91 7570,5235 7600,5205 7910,5205 SWD2.1@7965,5150 8025,5150 8090,5215 8365,5215 UART2.1@8425,5155 8590,4990 P3.3@8595,4990 ; v1(7560,4255) 7585,4255 7645,4315 v1(7645,4415) ; v1(7580,3600) 7580,3680 7785,3885 7785,3930 7750,3965 v1(7750,4166.54) ; v1(7970,3710) 7970,3635 8050,3555 v1(8100,3555) ; v1(8515,3460) 8515,3330 8555,3290 P3.37@8595,3290
  Bottom Layer w15: P4.1@7192,1853.91 7540,1853.91 ; v1(7560,4255) 7475,4170 7475,3865 7480,3860 7480,3670 7440,3630 7440,3470 7190,3220 7190,2490 7326.09,2353.91 P4.1@7492,2353.91 7410,2271.91 7410,2110 7540,1980 7540,1853.91 ; P6.2@8340,1870 9040,1870 9135,1965 9420,1965 v1(9421.42,1966.42) ; P6.2@8340,1875 8270,1805 7602.81,1805 7553.91,1853.91 7540,1853.91
VCC-5V: Cp10.2 Cp11.2 ME3.3 UART3.1 | length 757.2
  Top Layer w10: ME3.3@10493,4455 10640,4602 Cp10.2@10640,4630 10545,4725 10545,4812 Cp11.2@10640,4907 10738,5005 UART3.1@10765,5005
VCC-51: *1.6 Cp9.1 Cp12.2 ME3.2 SD_CARD.4 u8.10 | length 3795.3
  Top Layer w10: u8.10@10152.52,4628.5 10152.52,4519.52 Cp12.2@10128,4495 10398,4225 10510,4225 Cp9.1@10565,4280 ; SD_CARD.4@10454.38,3940.11 10510,3940.11 10515.11,3940.11 ; ME3.2@10530,4375 10565,4340 Cp9.1@10565,4280 ; v1(10570,3895) 10524.89,3940.11 10515.11,3940.11 ; 10515.11,3940.11 10535,3960 10535,4180 10565,4210 Cp9.1@10565,4280
  Bottom Layer w10: *1.6@10520,5140 10390,5010 10160,5010 10015,4865 10015,4015 10340,3690 10420,3690 *1.6@10520,3590 10520,3845 v1(10570,3895)
VCC_BAT: C1.1 C2.1 C3.1 C4.1 L1.1 M1.2 M2.1 M3.2 M4.1 P2.2 U1.1 U2.1 | length 7801.8
  Top Layer w10: P2.2@8992,5638 P2.2@8992,5653.91
  Top Layer w20: M1.2@8152,5638.91 C1.1@8277,5638.91 8308.09,5670 8975.91,5670 P2.2@8992,5653.91 ; M4.1@8175,2725 C4.1@8290.91,2725 ; C4.1@8292,2723.91 8418.91,2723.91 8470,2775 8925,2775 9040,2890 v1(9040,3015) ; P2.2@8992,5638 9121.09,5508.91 L1.1@9202,5508.91 9202,5483 U1.1@9295,5390 ; U1.1@9293,5395 9345,5447 v2(9345,5450) ; v2(9435,2950) 9435,2878.91 U2.1@9445,2868.91 9531.09,2868.91 9590,2810 v1(9590,2710) ; v1(10100,5665) 10180,5665 C2.1@10210,5635 M2.1@10320,5635 ; v1(10185,2690) 10210,2715 C3.1@10240,2715 M3.2@10350,2715
  Bottom Layer w20: v2(9435,2950) 9405,2980 9065,2980 9040,3005 9040,3030 9132.5,3122.5 9132.5,4057.5 9360,4285 9360,5225 9295,5290 9295,5400 v2(9345,5450) 9475,5450 9580,5555 9580,5595 9650,5665 v1(10100,5665) ; v1(9590,2710) 9590,2675 9665,2600 10095,2600 v1(10185,2690)
VCC_BATY: L4.1 P7.2 | length 187.3
  Top Layer w20: P7.2@10560,2155 10620,2155 L4.1@10710,2065
VCCY: Cp5.2 Cp7.1 ME2.3 R19.2 S-power1.2 USB2.1 | length 1756.6
  Top Layer w15: R19.2@9025,2025 9112.7,1937.3 9173.13,1937.3 USB2.1@9173.82,1936.61 9175,1935.43 v3(9175,1880)
  Top Layer w20: ME2.3@9930,1845 9945,1830 Cp7.1@10040,1830 ; v3(9990,1880) Cp7.1@10040,1830 ; S-power1.2@10470,1870 10470,1890 10425,1935 10320,1935 10250,1865 Cp5.2@10180,1865 10115,1865 10080,1830 Cp7.1@10040,1830
  Bottom Layer w20: v3(9175,1880) v3(9990,1880)
pads on no net: *1.7 P3.5 P3.24 P3.35 P3.38 P3.39 P3.40 P4. P5. S-power1.3 SD_CARD. SD_CARD.3 SD_CARD.8 SD_CARD.11 SD_CARD.12 SD_CARD.CD1 SD_CARD.CD2 Sp1.3 U3.1 U3.2 U3.3 U3.4 U3.11 U3.18 U3.19 U3.25 U3.26 U3.27 U3.28 U3.29 U3.39 U3.40 U3.41 U4.1 U4.2 U4.3 U4.4 U4.5 U4.6 U4.7 U4.12 U4.14 U4.15 U4.16 U4.17 U4.19 U4.21 U4.22 U5.1 U5.4 U6.4 U6.5 U6.6 U6.7 U6.8 U6.9 U6.26 U6.33 U6.35 U6.51 U6.58 U6.59 U6.60 U6.63 U6.64 U6.67 U6.73 U6.77 U6.80 U6.83 U6.84 U6.87 U6.89 U6.90 U6.91 U6.95 U6.96 U7.1 U7.2 U7.3 U7.4 U7.5 U7.6 U7.7 U7.12 U7.14 U7.15 U7.16 U7.17 U7.19 U7.21 U7.22 u8.9 u8.11 u8.15 u8.16 u8.27 USB1. USB1.4 USB1.6 USB2. USB2.4 USB2.6

## Polygon pours and split planes (outlines as drawn)
GND on Top Layer "Top Layer-No Net" (solid, remove dead copper, pour order 1000): 7665,5795 7640,5770 7640,5380 7640,5360 7700,5300 7715,5315 8050,5315 8790,5315 8795,5310 8780,5295 8780,2935 8050,2935 8030,2955 7825,2955 7655,2955 7650,2960 7670,2940 7670,2510 10875,2510 10890,2525 10875,2540 10875,2940 10815,2940 10800,2955 10445,2955 9700,2955 9690,2965 9685,2970 9685,5330 10455,5330 10475,5310 10480,5315 10795,5315 10930,5315 10945,5330 10925,5350 10925,5820
GNDY on Top Layer "Top Layer-No Net" (solid, remove dead copper, pour order 1000): 6790,5795 6760,5765 6760,1495 10900,1495 11100,1695 10875,1920 10875,2500 7705,2500 7655,2550 7640,2565 7640,2975 7687.75,2975 7745,3032.25 8200,3032.25 8807.25,3032.25 8815,3040 8805,3050 8805,5335 8103.02,5335 8005,5236.98 8001.98,5240 7640,5240 7640,5815 7630,5825
GND on Bottom Layer "Top Layer-No Net" (solid, remove dead copper, pour order 1001): 7665,5780 7640,5755 7640,5330 7705,5330 7725,5310 8020,5310 8815,5310 8825,5300 8795,5270 8795,2910 8095,2910 8045,2960 7705,2960 7705,2945 7630,2870 7635,2865 7635,2535 10860,2535 10865,2530 10845,2550 10845,2955 10800,2955 10795,2960 10790,2955 10390,2955 9730,2955 9680,3005 9690,3015 9690,5310 10320,5310 10325,5305 10335,5315 10855,5315 10855,5735 10860,5740
GNDY on Bottom Layer "Top Layer-No Net" (solid, remove dead copper, pour order 1001): 6790,5835 6800,5825 6800,1715 11015,1715 11045,1685 10890,1840 10890,2515 7695,2515 7625,2585 7640,2600 7640,3000 7640,3002.25 7670,3032.25 8195,3032.25 8832.75,3032.25 8835,3030 8800,3065 8800,5255 8018.02,5255 8000,5236.98 7996.98,5240 7735,5240 7715,5240 7685,5270 7650,5305 7650,5520 7650,5720

## Keep-outs
Keep-Out Layer:
  lines w3.94: 7677.91,5630.68 7677.91,5394.46 7756.65,5315.72 7756.65,5236.98 7599.17,5236.98 7599.17,5709.42 6890.5,5709.42 6890.5,1772.41 10827.51,1772.41 10827.51,2481.07 7599.17,2481.07 7599.17,3032.25 7756.65,3032.25 7756.65,2953.51 7677.91,2874.77 7677.91,2638.55 7756.65,2559.81 10748.77,2559.81 ; 7677.91,5630.68 7756.65,5709.42 10748.77,5709.42 ; 7677.91,5630.68 7677.91,5630.68 ; 9747,3032.25 9747,5236.98 ; 9747,3032.25 9747,5236.98 ; 9747,3032.25 10512.55,3032.25 10512.55,2953.51 10433.81,2874.77 10433.81,2796.03 9646.41,2796.03 9646.41,5473.2 10433.81,5473.2 10433.81,5394.46 10512.55,5315.72 10512.55,5236.98 9747,5236.98 ; 10748.77,2559.81 10748.77,2559.81 ; 10748.77,2559.81 10827.51,2638.55 10827.51,2874.77 ; 10748.77,5709.42 10827.51,5630.68 ; 10748.77,5709.42 10827.51,5630.68 ; 10827.51,2874.77 10827.51,2874.77 ; 10827.51,2874.77 10748.77,2953.51 10748.77,3032.25 10827.51,3032.25 10827.51,5236.98 10748.77,5236.98 10748.77,5315.72 10827.51,5394.46 ; 10827.51,5394.46 10827.51,5630.68 ; 10827.51,5394.46 10827.51,5394.46 ; 7992.87,2953.51 7992.87,3032.25 8762,3032.25 8762,5236.98 8701.53,5236.98 7992.87,5236.98 7992.87,5315.72 8071.61,5394.46 8071.61,5473.2 8859.01,5473.2 8859.01,2796.03 8071.61,2796.03 8071.61,2874.77 7992.87,2953.51

## Other copper
Top Layer:
  rectangle: 7765,5245 7985,5310
  rectangle: 7765,2960 7985,3025
  rectangle: 10705,5235 10740,5240
  text "ZHT 2015.01.23" at 9470,2310 h60

## Text inside footprints (layer, text, board x,y; h text height)
P1: Top Overlay "8" at 8992,4208.91 h30 r270; Top Overlay "7" at 8892,4208.91 h30 r270; Top Overlay "1" at 8892,4648.91 h30 r270; Top Overlay "2" at 8992,4668.91 h30 r270
P3: Top Overlay "1" at 8575,5190 h30 r270; Top Overlay "2" at 8675,5190 h30 r270; Top Overlay "40" at 8675,3110 h30 r270; Top Overlay "39" at 8575,3110 h30 r270
P6: Top Overlay "8" at 7980,1895 h30 r180; Top Overlay "7" at 7980,1995 h30 r180; Top Overlay "1" at 8420,1995 h30 r180; Top Overlay "2" at 8440,1895 h30 r180
USB1: Top Overlay "+" at 9127.08,2731.43 h30
USB2: Top Overlay "+" at 9095.08,1942.52 h30